# Altium PCB PCB2.PcbDoc (part 2 of 2)
Units mil, origin at the board's own origin, x right, y up, seen from the top; angles counter-clockwise.
Board outline 3889 x 3936 mil, 2 copper layers (Top Layer, Bottom Layer); 71 components, 78 nets, 442 pads, 93 vias.
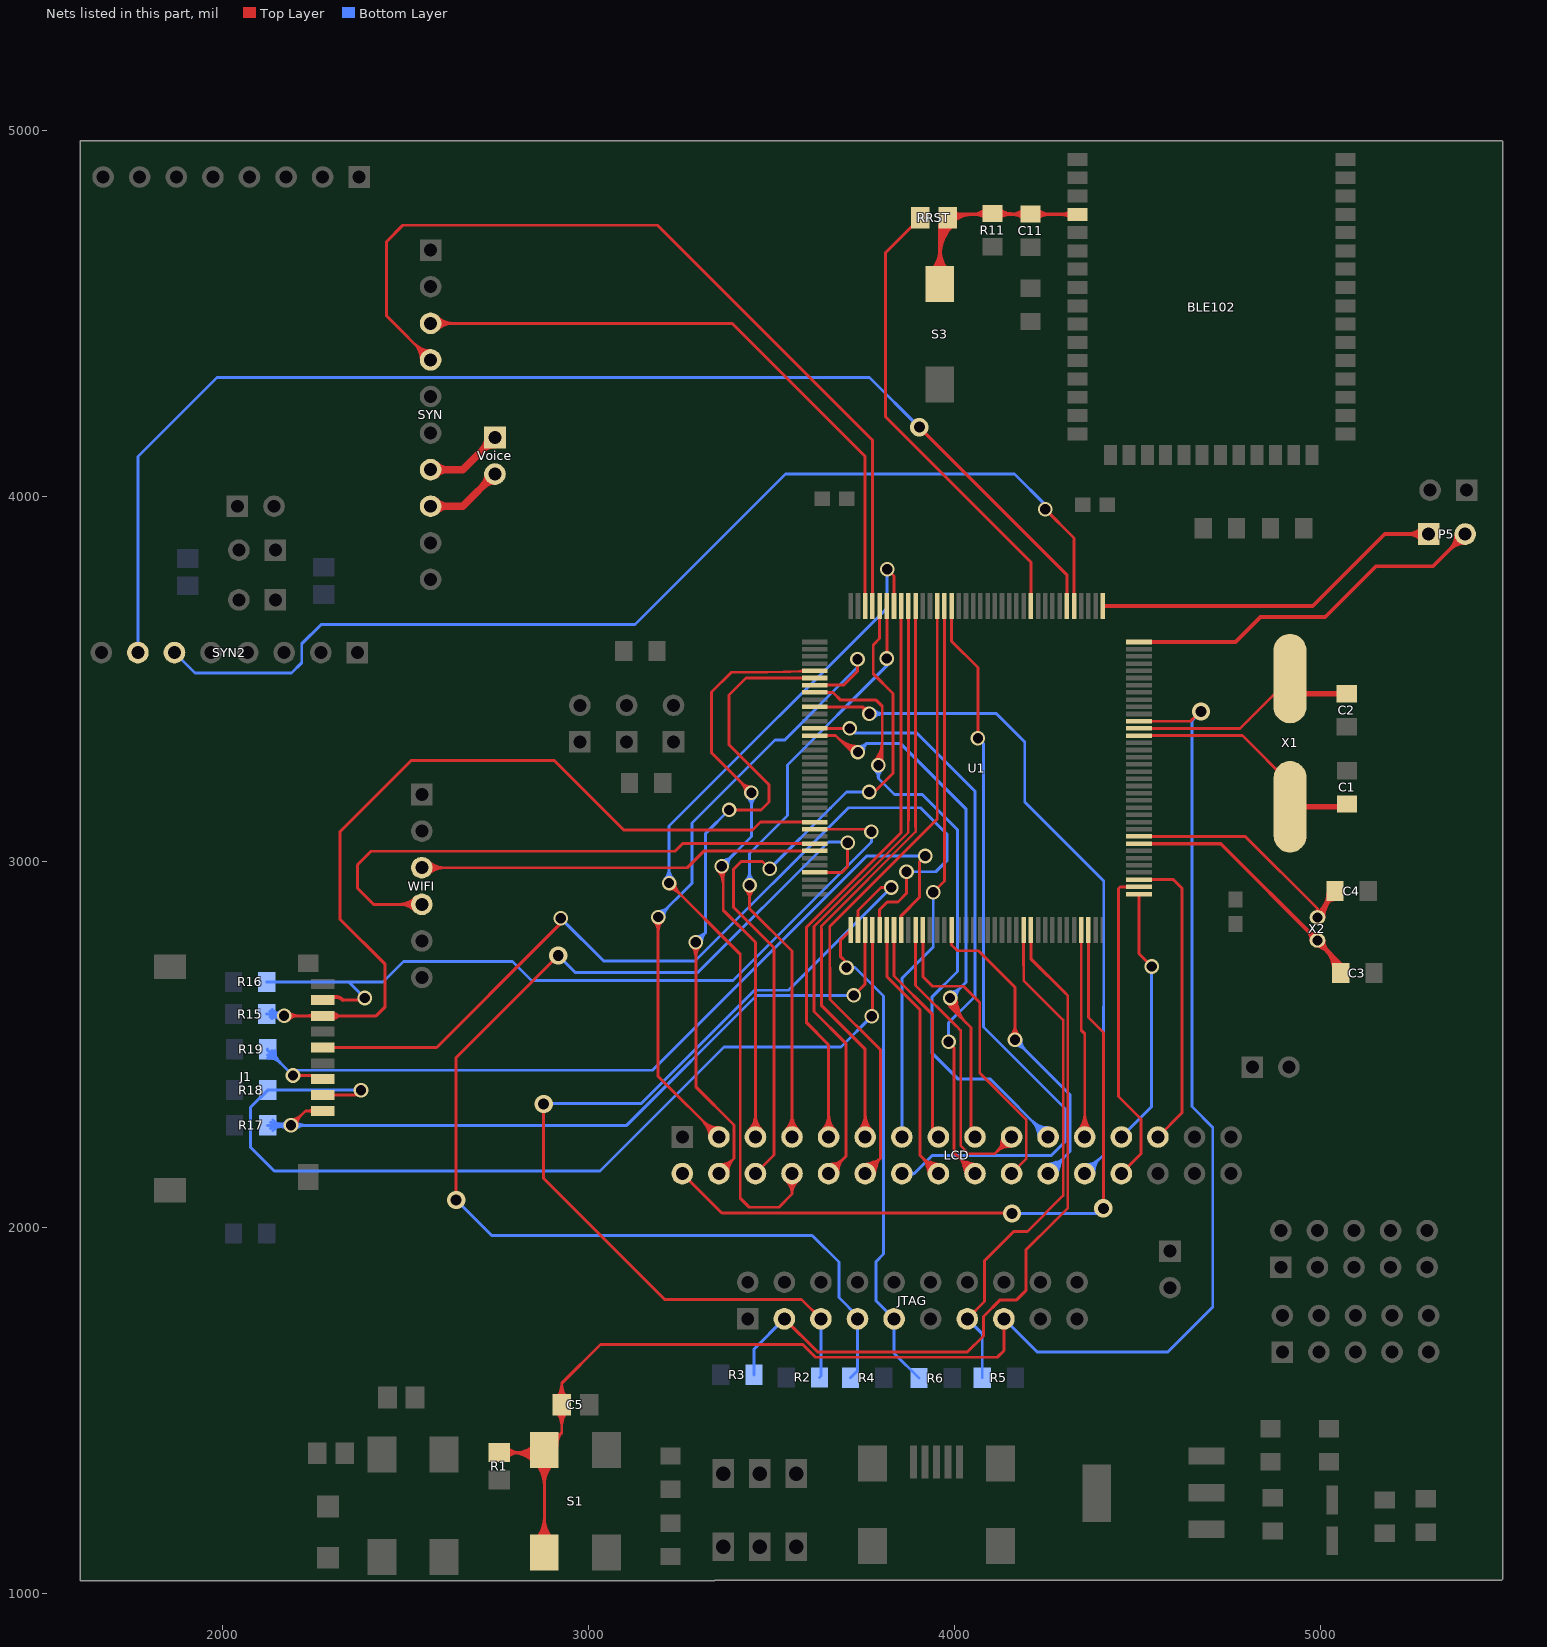
[diagram p2: the nets of this part, all layers, seen from the top]

## Via types
v1: diameter 40, hole 28, Top Layer to Bottom Layer, 56 vias
v2: diameter 50/50 (per signal layer), hole 30, Top Layer to Bottom Layer, 29 vias
v3: diameter 50/50 (per signal layer), hole 139.76, Top Layer to Bottom Layer, 6 vias
v4: diameter 40/40 (per signal layer), hole 30, Top Layer to Bottom Layer, 2 vias

## Nets (pads, with @x,y where several pads share a name; then routed paths per layer and width w, separated by ;. In a path a pad name is that pad's centre, name@x,y a point inside that pad or via, vN(x,y) a via of type N, cw(c..) or ccw(c..) an arc to the next point about the centre after c; other vN are vias at no path point) (continued)
NetRRST_2: RRST.2 U1.47 | length 1264.1
  Top Layer w8: RRST.2@3906.6,4760 3812,4665.4 3812,4216 4208.72,3819.28 U1.47@4208.72,3699.4
NetSYN_7: SYN.7 Voice.1 | length 371.9
  Top Layer w20: SYN.7@2560,4080 SYN.7@2568,4072 2656,4072 Voice.1@2744,4160 ; SYN.7@2581.81,4058.19 cw(c2615.14,4024.86) 2615.14,4072 cw(c2615.14,4119.14) SYN.7@2581.81,4085.81 ; Voice.1@2724.47,4160 cw(c2677.33,4160) 2710.66,4126.66 cw(c2744,4093.33) Voice.1@2744,4140.47
NetSYN_8: SYN.8 Voice.2 | length 371.9
  Top Layer w20: SYN.8@2560,3980 SYN.8@2568,3972 2656,3972 Voice.2@2744,4060 ; SYN.8@2581.81,3958.19 cw(c2615.14,3924.86) 2615.14,3972 cw(c2615.14,4019.14) SYN.8@2581.81,3985.81 ; Voice.2@2724.47,4060 cw(c2677.33,4060) 2710.66,4026.66 cw(c2744,3993.33) Voice.2@2744,4040.47
NRESET: BLE102.4 C11.2 R11.1 RRST.1 S3.1 | length 1919.6
  Top Layer w8: R11.1@4104,4772 4155,4772 ; R11.1@4116.19,4763.82 cw(c4135.81,4744.39) 4135.81,4772 cw(c4135.81,4799.61) R11.1@4116.19,4780.18 ; R11.1@4121.88,4758.19 cw(c4155,4725.38) 4155,4772 ; R11.1@4121.88,4785.81 ccw(c4155,4818.62) 4155,4772 ; C11.2@4190.19,4756.99 ccw(c4156.69,4723.49) 4156.69,4770.87 ccw(c4156.69,4818.24) C11.2@4190.19,4784.74 ; C11.2@4195.85,4762.65 ccw(c4176.01,4742.81) 4176.01,4770.87 ccw(c4176.01,4798.92) C11.2@4195.85,4779.08 ; C11.2@4208,4770.87 4156.13,4770.87 4155,4772
  Top Layer w10: S3.1@3935.7,4614.15 ccw(c3877.02,4672.82) 3960,4672.82 ccw(c4042.98,4672.82) S3.1@3984.3,4614.15 ; S3.1@3942.77,4607.07 ccw(c3901.17,4648.68) 3960,4648.68 ccw(c4018.83,4648.68) S3.1@3977.23,4607.07 ; S3.1@3960,4580 3960,4738.6 RRST.1@3981.4,4760 3991.28,4769.87 BLE102.4@4336,4769.87 ; 3960,4654.68 cw(c4082.78,4654.68) RRST.1@3995.96,4741.5 ; 3960,4678.83 cw(c4058.64,4678.83) RRST.1@3988.89,4748.57 ; 3960,4702.97 cw(c4034.5,4702.97) RRST.1@3981.82,4755.65 ; 3960,4727.11 cw(c4010.35,4727.11) RRST.1@3974.75,4762.72 ; RRST.1@3988.89,4756.45 cw(c4021.3,4724.04) 4021.3,4769.87 ; RRST.1@3995.96,4749.38 cw(c4045.45,4699.89) 4045.45,4769.87 ; RRST.1@3995.96,4778.5 ccw(c4016.78,4799.31) 4016.78,4769.87 ; 4049.97,4769.87 ccw(c4049.97,4822.09) R11.1@4086.9,4785.17 ; 4060.24,4769.87 cw(c4060.24,4732.18) R11.1@4086.9,4758.83 ; 4074.11,4769.87 ccw(c4074.11,4797.95) R11.1@4093.97,4778.1 ; R11.1@4114.03,4778.1 ccw(c4133.89,4797.95) 4133.89,4769.87 ; R11.1@4121.1,4758.83 cw(c4147.76,4732.18) 4147.76,4769.87 ; R11.1@4121.1,4785.17 ccw(c4158.03,4822.09) 4158.03,4769.87 ; 4156.71,4769.87 ccw(c4156.71,4818.22) C11.2@4190.9,4784.03 ; 4161.5,4769.87 cw(c4161.5,4728.3) C11.2@4190.9,4757.7 ; C11.2@4225.1,4757.7 cw(c4254.5,4728.3) 4254.5,4769.87 ; C11.2@4225.1,4784.03 ccw(c4259.29,4818.22) 4259.29,4769.87 ; 4295.46,4769.87 cw(c4295.46,4739.17) 4317.17,4760.88 ccw(c4295.46,4739.17) 4295.46,4769.87 ; 4295.46,4769.87 ccw(c4295.46,4800.57) 4317.17,4778.87 cw(c4295.46,4800.57) 4295.46,4769.87
NRST: C5.1 JTAG.15 R1.1 S1.1 S1.4 U1.25 | length 5901.3
  Top Layer w8: R1.1@2756,1385.4 2872.4,1385.4 S1.4@2879,1392 ; R1.1@2769.55,1375.79 cw(c2792.75,1352.59) 2792.75,1385.4 cw(c2792.75,1418.21) R1.1@2769.55,1395.01 ; R1.1@2775.2,1370.14 cw(c2812.06,1333.28) 2812.06,1385.4 cw(c2812.06,1437.53) R1.1@2775.2,1400.67 ; 2785.78,1385.4 cw(c2785.78,1288.93) 2853.99,1357.15 cw(c2793.61,1296.77) 2879,1296.77 cw(c2964.39,1296.77) S1.4@2904.01,1357.15 ; 2801.44,1385.4 ccw(c2801.44,1459.72) S1.4@2853.99,1407.17 ; 2805.09,1385.4 cw(c2805.09,1308.25) 2859.65,1362.8 cw(c2812.92,1316.08) 2879,1316.08 cw(c2945.08,1316.08) S1.4@2898.35,1362.8 ; 2820.76,1385.4 ccw(c2820.76,1440.4) S1.4@2859.65,1401.51 ; 2824.4,1385.4 cw(c2824.4,1327.56) 2865.3,1368.46 cw(c2832.24,1335.39) 2879,1335.39 cw(c2925.76,1335.39) S1.4@2892.7,1368.46 ; S1.1@2853.99,1146.85 ccw(c2793.61,1207.23) 2879,1207.23 ccw(c2964.39,1207.23) S1.1@2904.01,1146.85 ; S1.1@2859.65,1141.2 ccw(c2812.92,1187.92) 2879,1187.92 ccw(c2945.08,1187.92) S1.1@2898.35,1141.2 ; S1.1@2865.3,1135.54 ccw(c2832.24,1168.61) 2879,1168.61 ccw(c2925.76,1168.61) S1.1@2892.7,1135.54 ; S1.1@2879,1112 S1.4@2879,1392 ; S1.4@2890.61,1426.63 ccw(c2901.07,1448.99) 2918.53,1431.53 ; S1.4@2894,1433.88 ccw(c2906.22,1459.97) 2926.6,1439.6 ; S1.4@2906.25,1404.43 cw(c2935.01,1407.15) S1.4@2914.58,1427.58 ; C5.1@2911.33,1496.8 cw(c2874.47,1459.94) 2926.6,1459.94 cw(c2978.72,1459.94) C5.1@2941.86,1496.8 ; S1.4@2914.21,1405.18 cw(c2956.96,1409.23) 2926.6,1439.6 ; C5.1@2916.99,1502.45 cw(c2893.79,1479.25) 2926.6,1479.25 cw(c2959.41,1479.25) 2936.21,1502.45 2936.21,1530 2936.21,1529.55 cw(c2959.41,1552.75) 2926.6,1552.75 cw(c2893.79,1552.75) 2916.99,1529.55 2916.99,1530 2914,1530 2914,1535.2 2911.33,1535.2 ccw(c2874.47,1572.06) 2926.6,1572.06 ; C5.1@2926.6,1516 2926.6,1439.6 ; C5.1@2941.86,1535.2 cw(c2978.72,1572.06) 2926.6,1572.06 ; JTAG.15@4135,1751 4135,1664 4117,1646 3620.2,1646 3585.2,1681 3032.6,1681 2926.6,1575 2926.6,1572.06 ; U1.25@4504,3384.44 4645.44,3384.44 v2@4681,3420 ; S1.4@2879,1392 2926.6,1439.6
  Bottom Layer w8: JTAG.15@4135,1751 4226,1660 4583,1660 4706,1783 4706,2274 4649,2331 4649,3386 v2(4674,3411)
NTRST: JTAG.3 R3.1 U1.134 | length 2060.9
  Top Layer w7: 4274.53,2018.73 4310,2054.2 4310,2634 4304.5,2639.5
  Top Layer w8: JTAG.3@3535,1751 3626,1660 4035,1660 4079,1704 4079,1757 4125,1803 4170,1803 4195,1828 4195,1939.2 4274.53,2018.73 ; U1.134@4208.72,2813.57 4208.72,2735.28 4304.5,2639.5
  Bottom Layer w8: R3.1@3452,1598 3452,1668 JTAG.3@3535,1751
OSC32_IN: C3.1 U1.8 X2.2 | length 1109.6
  Top Layer w8: X2.2@4994.13,2770.46 4994.13,2770 5019,2756 5020.1,2752.44
  Top Layer w10: U1.8@4504,3049.8 4727.51,3049.8 X2.2@4992.17,2785.14 5056,2721.31 C3.1@5056,2696 ; 4963.74,2813.57 cw(c4935.31,2785.14) X2.2@4975.51,2785.14 ; 4968.49,2808.82 ccw(c4990.2,2830.53) X2.2@4990.2,2799.83 ; X2.2@4991.56,2770.69 cw(c4983.81,2727.11) 5020.1,2752.44 ; X2.2@4994.13,2770.46 cw(c4994.13,2739.76) 5015.84,2761.47 ; X2.2@4998.62,2771.16 cw(c5001.6,2761.83) 5009.64,2767.44 cw(c5021.1,2775.43) X2.2@5007.95,2780.17 ; X2.2@5008.59,2782.57 ccw(c5034.83,2777.91) 5012.98,2762.65 ; X2.2@5008.82,2785.14 ccw(c5049.02,2785.14) 5020.6,2756.71 ; 5009.1,2768.21 cw(c4940.82,2699.94) C3.1@5037.38,2699.94 ; 5026.17,2751.14 cw(c4974.96,2699.94) C3.1@5047.38,2699.94 ; 5043.24,2734.07 cw(c5009.11,2699.94) C3.1@5057.38,2699.94
OSC32_OUT: C4.1 U1.9 X2.1 | length 957.1
  Top Layer w8: U1.9@4504,3069.48 4794.85,3069.48 4992.17,2872.17 ; X2.1@4992.17,2848.14 X2.1@4992.17,2860 ; X2.1@4993.82,2848.14 cw(c5026.45,2848.14) 5003.38,2871.21 ; 5000.68,2868.52 ccw(c4953.14,2916.06) C4.1@5020.38,2916.06 ; X2.1@5001.82,2848.14 cw(c5053.77,2848.14) 5017.03,2884.87 ; X2.1@5009.82,2848.14 cw(c5081.08,2848.14) C4.1@5030.69,2898.53 ; 5014.34,2882.18 ccw(c4980.45,2916.06) C4.1@5028.38,2916.06 ; 5020.55,2888.38 cw(c5040,2868.94) C4.1@5040,2896.44 ; C4.1@5040,2920 5040,2907.83 X2.1@4992.17,2860 ; X2.1@4992.17,2860 4992.17,2872.17 ; 4992.17,2872.17 cw(c4981.6,2872.17) 4985.85,2862.49 ccw(c4981.6,2872.17) 4992.17,2872.17 ; 4992.17,2872.17 ccw(c5002.73,2872.17) 4998.48,2862.49 cw(c5002.73,2872.17) 4992.17,2872.17
OSC_IN: C1.2 U1.23 X1.2 | length 690.2
  Top Layer w8: U1.23@4504,3345.07 4786.93,3345.07 4917.34,3214.66 X1.2@4917.34,3150.61
  Top Layer w15: X1.2@4917.34,3150.61 5065.47,3150.61 C1.2@5073,3158.13
OSC_OUT: C2.2 U1.24 X1.1 | length 647.5
  Top Layer w8: U1.24@4504,3364.75 4780.75,3364.75 X1.1@4917,3501
  Top Layer w15: X1.1@4917,3501 4958.13,3459.87 C2.2@5078,3459.87
PC8: J1.7 R15.1 U1.98 | length 2919.3
  Top Layer w8: v1(2167.74,2579.26) J1.7@2273.39,2579.26 2284,2579.26 2314.71,2579.26 ; v1@2179.05,2567.95 cw(c2206.37,2540.63) 2206.37,2579.26 cw(c2206.37,2617.89) v1@2179.05,2590.57 ; J1.7@2248.75,2572.34 ccw(c2232.06,2555.65) 2232.06,2579.26 ccw(c2232.06,2602.87) J1.7@2248.75,2586.18 ; J1.7@2298.02,2572.34 cw(c2314.71,2555.65) 2314.71,2579.26 ; J1.7@2298.02,2586.18 ccw(c2314.71,2602.87) 2314.71,2579.26 ; U1.98@3618.17,3108.85 3470,3108.85 3448.15,3087 3096,3087 2906,3277 2515,3277 2320,3082 2320,2844 2444,2720 2444,2604 2419.26,2579.26 2314.71,2579.26
  Top Layer w10: J1.7@2273.39,2579.26 ccw(c2294.05,2599.92) 2314.71,2579.26 ccw(c2299.36,2563.9) J1.7@2284,2579.26
  Bottom Layer w8: v1(2167.74,2579.26) v1@2163,2584 ; R15.1@2120,2584 cw(c2120,2534.69) 2156.04,2568.34 ccw(c2120,2534.69) R15.1@2120,2584 ; R15.1@2120,2584 v1@2163,2584 ; 2145.47,2584 cw(c2145.47,2606.09) 2128.78,2591.62 ccw(c2145.47,2606.09) 2145.47,2584 ; 2145.47,2584 ccw(c2145.47,2561.91) 2128.78,2576.38 cw(c2145.47,2561.91) 2145.47,2584 ; v1@2163,2584 cw(c2163,2621.3) 2134.82,2596.86 ccw(c2163,2621.3) v1@2163,2584 ; v1@2163,2584 ccw(c2163,2546.7) 2134.82,2571.14 cw(c2163,2546.7) v1@2163,2584 ; R15.1@2138.42,2584 cw(c2138.42,2551.88) 2161.89,2573.8 ccw(c2138.42,2551.88) R15.1@2138.42,2584 ; R15.1@2140.56,2584 ccw(c2140.56,2606.44) 2156.43,2590.57 cw(c2140.56,2606.44) R15.1@2140.56,2584
PC9: J1.8 R16.1 U1.99 | length 2304.5
  Top Layer w8: J1.8@2273.39,2622.57 J1.8@2288,2622.57 ; 2328,2622.57 2382.57,2622.57 v1(2388,2628) ; U1.99@3618.17,3089.17 3718.83,3089.17 ; 3678,3089.17 3718.83,3089.17 ; v1(3773,3082) 3765.83,3089.17 3718.83,3089.17
  Top Layer w10: J1.8@2288,2622.57 cw(c2308,2602.57) 2328,2622.57
  Bottom Layer w8: R16.1@2120,2672 2344,2672 ; v1(2388,2628) 2356,2660 2352,2664 2344,2672 ; 3340,2676 3380,2676 ; v1(3773,3082) 3773,3054 3395,2676 3380,2676 ; 2344,2672 2438,2672 2494,2728 2792,2728 2844,2676 3380,2676
PC10: J1.1 R17.2 U1.111 | length 2505.2
  Top Layer w8: v1(2186.58,2280) 2226,2319.42 J1.1@2273.39,2319.42 ; v1@2186.58,2296 ccw(c2186.58,2334.63) 2213.9,2307.31 ccw(c2241.21,2280) v1@2202.58,2280 ; J1.1@2248.75,2312.5 ccw(c2232.06,2295.81) 2232.06,2319.42 ccw(c2232.06,2343.03) J1.1@2248.75,2326.33 ; v1(3725,2635) 3755.97,2665.97 3755.97,2739.97 ; 3755.97,2748 3755.97,2739.97 ; U1.111@3755.97,2813.58 3755.97,2739.97
  Bottom Layer w8: R17.2@2122.87,2280 v1(2186.58,2280) 3104,2280 3459,2635 v1(3725,2635) ; R17.2@2131.08,2271.78 cw(c2150.92,2251.94) 2150.92,2280 cw(c2150.92,2308.06) R17.2@2131.08,2288.22 ; R17.2@2136.74,2266.13 cw(c2170.24,2232.63) 2170.24,2280 cw(c2170.24,2327.37) R17.2@2136.74,2293.87 ; 2153.63,2275.55 cw(c2159.07,2255.27) v1@2174.68,2269.3 ; 2153.63,2284.45 ccw(c2159.07,2304.73) v1@2174.68,2290.7 ; 2158.04,2276.73 ccw(c2151.78,2300.09) v1@2172.73,2288 ; 2158.04,2283.27 cw(c2151.78,2259.91) v1@2172.73,2272 ; 2166.23,2278.93 cw(c2169.95,2265.05) v1@2180.63,2274.65 ; 2166.23,2281.07 ccw(c2169.95,2294.95) v1@2180.63,2285.35 ; v1@2175.27,2268.69 ccw(c2147.95,2241.37) 2147.95,2280 ccw(c2147.95,2318.63) v1@2175.27,2291.31 ; v1@2197.9,2268.69 cw(c2225.21,2241.37) 2225.21,2280 cw(c2225.21,2318.63) v1@2197.9,2291.31
PC11: J1.2 R18.2 U1.112 | length 2710.7
  Top Layer w8: J1.2@2273.39,2362.72 2364.72,2362.72 v1(2378,2376) ; v1(3774,2578) 3775.65,2579.65 3775.65,2664.35 ; 3775.65,2698 3775.65,2664.35 ; U1.112@3775.65,2813.57 3775.65,2664.35
  Bottom Layer w8: v1(2378,2376) R18.2@2122.87,2376 2076,2329.13 2076,2220 2141,2155 3031,2155 3370,2494 3690,2494 v1(3774,2578)
PC12: J1.5 U1.113 | length 2585.3
  Top Layer w8: J1.5@2273.39,2492.65 2584.65,2492.65 2872,2780 ; 2822,2730 2872,2780 ; v1(2924,2846) 2924,2832 2872,2780 ; U1.113@3795.34,2813.57 3795.34,2869.34 3816.5,2890.5 3845.5,2890.5 3869,2914 v1(3869,2973)
  Bottom Layer w8: v1(2924,2846) 3041.25,2728.75 3291,2728.75 3710.25,3148 3907,3148 3979,3076 3979,3003 3949,2973 v1(3869,2973)
PD0: LCD.16 U1.114 | length 1642.4
  Top Layer w8: U1.114@3815.02,2813.57 3815.02,2686.58 3906,2595.6 3906,2198 LCD.16@3956,2148 ; 3921.21,2182.55 ccw(c3965.51,2194.42) LCD.16@3956.31,2149.5 ; 3921.45,2182.79 cw(c3909.58,2138.49) LCD.16@3954.5,2147.69 ; 3924.57,2170.04 ccw(c3962.6,2180.24) LCD.16@3954.7,2141.66 ; 3927.27,2176 ccw(c3946.54,2186.15) LCD.16@3951.78,2165.01 ; 3927.92,2157.54 ccw(c3959.7,2166.05) LCD.16@3953.1,2133.82 ; 3928,2176.73 cw(c3917.85,2157.46) LCD.16@3938.99,2152.22 ; 3930.25,2170.34 cw(c3913.1,2161.3) LCD.16@3931.62,2155.56 ; LCD.16@3931.59,2155.47 ccw(c3910.02,2162.08) 3926.08,2177.92 ; LCD.16@3931.64,2155.62 ccw(c3910.58,2162.21) 3926.08,2177.92 ; LCD.16@3931.68,2155.76 ccw(c3911.07,2162.33) 3926.47,2177.53 ; LCD.16@3931.73,2155.91 ccw(c3911.61,2162.47) 3926.47,2177.53 ; 3932.03,2166.97 ccw(c3949.07,2175.94) LCD.16@3953.71,2157.25 ; 3933.66,2173.75 ccw(c3942.7,2190.9) LCD.16@3948.44,2172.38 ; 3933.96,2179.43 cw(c3923.76,2141.4) LCD.16@3962.34,2149.3 ; 3937.03,2171.97 cw(c3928.06,2154.93) LCD.16@3946.75,2150.29 ; 3946.46,2176.08 cw(c3937.95,2144.3) LCD.16@3970.18,2150.9 ; LCD.16@3948.09,2172.27 cw(c3941.53,2192.39) 3926.47,2177.53 ; LCD.16@3948.24,2172.32 cw(c3941.67,2192.93) 3926.47,2177.53 ; LCD.16@3948.38,2172.36 cw(c3941.79,2193.42) 3926.08,2177.92 ; LCD.16@3948.53,2172.41 cw(c3941.92,2193.98) 3926.08,2177.92 ; 3912.42,2191.58 cw(c3868.84,2148) 3930.47,2148 ccw(c3868.84,2148) 3912.42,2191.58 ; 3912.42,2191.58 ccw(c3956,2235.16) 3956,2173.53 cw(c3956,2235.16) 3912.42,2191.58 ; 3926.08,2177.92 cw(c3896.16,2148) 3938.47,2148 ccw(c3896.16,2148) 3926.08,2177.92 ; 3926.08,2177.92 ccw(c3956,2207.84) 3956,2165.53 cw(c3956,2207.84) 3926.08,2177.92
PD1: LCD.15 U1.115 | length 615.8
  Top Layer w8: U1.115@3834.71,2813.58 3834.71,2688.12 3939.42,2583.42 3939.42,2264.58 LCD.15@3956,2248
PD4: LCD.19 U1.118 | length 1154.7
  Top Layer w7: 4005,2551 4017,2539 4017,2264.22 ; 4016.97,2264.19 4016.97,2225.03 4040,2202 4110,2202 4127,2219
  Top Layer w8: U1.118@3893.77,2813.57 3893.77,2662.23 4005,2551 ; 4127,2219 LCD.19@4156,2248 ; 4128.24,2233.2 cw(c4165.92,2226.33) LCD.19@4149.97,2261.16 ; 4141.2,2220.24 ccw(c4134.33,2257.92) LCD.19@4169.16,2241.97 ; 4117,2209 ccw(c4083.9,2242.1) 4130.56,2245.92 cw(c4083.9,2242.1) 4117,2209 ; 4117,2209 cw(c4150.1,2175.9) 4153.92,2222.56 ccw(c4150.1,2175.9) 4117,2209 ; 4129.22,2221.22 ccw(c4106.5,2243.95) 4138.53,2246.57 cw(c4106.5,2243.95) 4129.22,2221.22 ; 4129.22,2221.22 cw(c4151.95,2198.5) 4154.57,2230.53 ccw(c4151.95,2198.5) 4129.22,2221.22
PD5: LCD.20 U1.119 | length 849
  Top Layer w7: LCD.20@4156,2148 4196,2188 4196,2296 4163,2329
  Top Layer w8: U1.119@3913.45,2813.57 3913.45,2686.55 3940,2660 4025,2660 4069,2616 4069,2423 4163,2329
PD7: LCD.22 U1.123 | length 1664.9
  Top Layer w8: U1.123@3992.19,2813.57 3992.19,2772.81 4008,2757 4066,2757 4165.5,2657.5 v1(4165.5,2514) ; v1@4154.19,2525.31 ccw(c4126.87,2552.63) 4165.5,2552.63 ccw(c4204.13,2552.63) v1@4176.81,2525.31
  Bottom Layer w8: v1@4165.5,2498 cw(c4165.5,2459.37) 4192.81,2486.69 cw(c4220.13,2514) v1@4181.5,2514 ; v1(4165.5,2514) 4316,2363.5 4316,2208 LCD.22@4256,2148 ; LCD.22@4241.82,2150.9 cw(c4274.05,2144.3) 4265.54,2176.08 ; LCD.22@4249.66,2149.3 cw(c4288.24,2141.4) 4278.04,2179.43 ; LCD.22@4255.69,2149.5 ccw(c4246.49,2194.42) 4290.79,2182.55 ; LCD.22@4257.3,2141.66 ccw(c4249.4,2180.24) 4287.43,2170.04 ; LCD.22@4257.5,2147.69 cw(c4302.42,2138.49) 4290.55,2182.79 ; LCD.22@4258.9,2133.82 ccw(c4252.3,2166.05) 4284.08,2157.54 ; LCD.22@4263.47,2172.41 ccw(c4270.08,2193.98) 4285.92,2177.92 ; LCD.22@4263.62,2172.36 ccw(c4270.21,2193.42) 4285.92,2177.92 ; LCD.22@4280.36,2155.62 cw(c4301.42,2162.21) 4285.92,2177.92 ; LCD.22@4280.41,2155.47 cw(c4301.98,2162.08) 4285.92,2177.92 ; 4285.92,2177.92 cw(c4256,2207.84) 4256,2165.53 ccw(c4256,2207.84) 4285.92,2177.92 ; 4285.92,2177.92 ccw(c4315.84,2148) 4273.53,2148 cw(c4315.84,2148) 4285.92,2177.92 ; 4299.58,2191.58 cw(c4256,2235.16) 4256,2173.53 ccw(c4256,2235.16) 4299.58,2191.58 ; 4299.58,2191.58 ccw(c4343.16,2148) 4281.53,2148 cw(c4343.16,2148) 4299.58,2191.58
PD8: LCD.5 U1.77 | length 2090.7
  Top Layer w8: v1@3352.69,2976.69 cw(c3315.72,2939.72) 3368,2939.72 ; v1@3358.34,2982.34 cw(c3335.03,2959.03) 3368,2959.03 cw(c3392.97,2959.03) v1@3375.31,2976.69 ; v1(3364,2988) 3368,2984 3368,2868 3456,2780 LCD.5@3456,2248 ; v1@3429,3189 ccw(c3390.37,3189) 3417.69,3216.31 ccw(c3445,3243.63) v1@3445,3205 ; LCD.5@3437.95,2266.05 ccw(c3394.37,2309.63) 3456,2309.63 ccw(c3517.63,2309.63) LCD.5@3474.05,2266.05 ; LCD.5@3443.61,2260.39 ccw(c3413.68,2290.32) 3456,2290.32 ccw(c3498.32,2290.32) LCD.5@3468.39,2260.39 ; v1(3445,3189) 3336,3298 3336,3464 3390.3,3518.3 3488,3518.3 U1.77@3618.17,3522.24 ; 3581.46,3521.13 ccw(c3581.2,3529.57) 3587.35,3523.78 cw(c3581.2,3529.57) 3581.46,3521.13
  Bottom Layer w8: v1@3356,2988 v1(3364,2988) 3445,3069 v1(3445,3189) ; v1@3364,3004 ccw(c3364,3042.63) 3391.31,3015.31 ccw(c3418.63,2988) v1@3380,2988 ; v1@3433.69,3177.69 cw(c3406.37,3150.37) 3445,3150.37 cw(c3483.63,3150.37) v1@3456.31,3177.69
PD9: LCD.4 U1.78 | length 2055.3
  Top Layer w8: v1@3281.69,2768.69 cw(c3254.37,2741.37) 3293,2741.37 cw(c3331.63,2741.37) v1@3304.31,2768.69 ; v1(3293,2780) 3293,2385.58 3397.53,2281.06 3397.53,2189.53 LCD.4@3356,2148 ; LCD.4@3357.59,2165.46 ccw(c3360.42,2196.48) 3382.45,2174.45 ccw(c3404.48,2152.42) LCD.4@3373.46,2149.59 ; LCD.4@3358.32,2173.42 ccw(c3362.44,2218.61) 3394.53,2186.53 ccw(c3426.61,2154.44) LCD.4@3381.42,2150.32 ; v1(3384,3142) 3471,3142 3493,3164 3493,3211 3384,3320 3384,3456 3430.55,3502.55 U1.78@3618.17,3502.55
  Bottom Layer w8: v1(3293,2780) 3320,2807 ; v1@3293.13,2796 ccw(c3293.44,2833.56) 3320,2807 ; v1@3309,2780.13 cw(c3346.56,2780.44) 3320,2807 ; v1(3384,3142) 3320,3078 3320,2807
PD10: LCD.3 U1.79 | length 2066.3
  Top Layer w8: v1@3178.69,2837.69 cw(c3151.37,2810.37) 3190,2810.37 cw(c3228.63,2810.37) v1@3201.31,2837.69 ; v1(3190,2849) 3190,2414 LCD.3@3356,2248 ; LCD.3@3330.47,2248 ccw(c3268.84,2248) 3312.42,2291.58 ccw(c3356,2335.16) LCD.3@3356,2273.53 ; LCD.3@3338.47,2248 ccw(c3296.16,2248) 3326.08,2277.92 ccw(c3356,2307.84) LCD.3@3356,2265.53 ; U1.79@3618.17,3482.87 3696.87,3482.87 3735,3521 v1(3735,3554)
  Bottom Layer w8: v1(3190,2849) 3282.5,2941.5 3282.5,3106.5 3509.41,3333.41 3536,3333.41 3735,3532.41 v1(3735,3554) ; v1@3190,2865 ccw(c3190,2903.63) 3217.31,2876.31 ccw(c3244.63,2849) v1@3206,2849
PD11: LCD.21 U1.80 | length 2075.7
  Top Layer w8: U1.80@3618.17,3463.18 3667.9,3463.18 3689.07,3442.01 3785.99,3442.01 3802.5,3425.5 3802.5,3274.5 v1(3792,3264) ccw(c3766.65,3289.35) 3802.5,3289.35 ; v1@3780.69,3275.31 ccw(c3728.02,3327.98) 3802.5,3327.98 ; v1@3786.34,3269.66 ccw(c3747.34,3308.66) 3802.5,3308.66
  Bottom Layer w8: v1@3781.28,3252.12 cw(c3759.5,3228) 3792,3228 ; v1(3792,3264) 3792,3228 ; v1@3802.72,3252.12 ccw(c3824.5,3228) 3792,3228 ; LCD.21@4230.47,2248 ccw(c4168.84,2248) 4212.42,2291.58 ccw(c4256,2335.16) LCD.21@4256,2273.53 ; LCD.21@4238.47,2248 ccw(c4196.16,2248) 4226.08,2277.92 ccw(c4256,2307.84) LCD.21@4256,2265.53 ; LCD.21@4256,2248 4097,2407 4009,2407 3938,2478 3938,2630 4008,2700 4008,3088 3912,3184 3836,3184 3792,3228
PD13: LCD.24 U1.82 | length 2163.2
  Top Layer w8: U1.82@3618.17,3423.81 3748.69,3423.81 ; v1(3767.5,3405) 3748.69,3423.81 ; 3748.69,3423.81 cw(c3738.71,3413.83) 3752.2,3409.69 ccw(c3738.71,3413.83) 3748.69,3423.81 ; 3748.69,3423.81 ccw(c3758.67,3433.79) 3762.81,3420.3 cw(c3758.67,3433.79) 3748.69,3423.81
  Bottom Layer w8: v1(3767.5,3405) 4115,3405 4192,3328 4192,3164 4408,2948 4408,2605 4407,2604 4407,2199 LCD.24@4356,2148 ; v1@3778.81,3393.69 cw(c3806.13,3366.37) 3806.13,3405 cw(c3806.13,3443.63) v1@3778.81,3416.31 ; LCD.24@4357.43,2165.47 ccw(c4360.05,2197.5) 4382.78,2174.78 ccw(c4405.5,2152.05) LCD.24@4373.47,2149.43 ; LCD.24@4358.08,2173.44 ccw(c4361.9,2220.1) 4395,2187 ccw(c4428.1,2153.9) LCD.24@4381.44,2150.08
PD14: LCD.18 U1.85 | length 2361.8
  Top Layer w8: U1.85@3618.17,3364.75 v1(3714,3364.75) ; v1(3984,2508) 3999,2493 3999,2205 LCD.18@4056,2148 ; 4021.21,2182.55 ccw(c4065.51,2194.42) LCD.18@4056.31,2149.5 ; 4021.45,2182.79 cw(c4009.58,2138.49) LCD.18@4054.5,2147.69 ; 4024.57,2170.04 ccw(c4062.6,2180.24) LCD.18@4054.7,2141.66 ; 4027.27,2176 ccw(c4046.54,2186.15) LCD.18@4051.78,2165.01 ; 4028,2176.73 cw(c4017.85,2157.46) LCD.18@4038.99,2152.22 ; 4030,2174 4046,2174 4046,2176.08 4046.46,2176.08 cw(c4037.95,2144.3) LCD.18@4070.18,2150.9 ; 4030.25,2170.34 cw(c4013.1,2161.3) LCD.18@4031.62,2155.56 ; LCD.18@4031.64,2155.62 ccw(c4010.58,2162.21) 4026.08,2177.92 ; LCD.18@4031.68,2155.76 ccw(c4011.07,2162.33) 4026.47,2177.53 ; LCD.18@4031.73,2155.91 ccw(c4011.61,2162.47) 4026.47,2177.53 ; 4032.03,2166.97 ccw(c4049.07,2175.94) LCD.18@4053.71,2157.25 ; 4033.66,2173.75 ccw(c4042.7,2190.9) LCD.18@4048.44,2172.38 ; 4033.96,2179.43 cw(c4023.76,2141.4) LCD.18@4062.34,2149.3 ; 4037.03,2171.97 cw(c4028.06,2154.93) LCD.18@4046.75,2150.29 ; LCD.18@4048.09,2172.27 cw(c4041.53,2192.39) 4026.47,2177.53 ; LCD.18@4048.24,2172.32 cw(c4041.67,2192.93) 4026.47,2177.53 ; LCD.18@4048.38,2172.36 cw(c4041.79,2193.42) 4026.08,2177.92 ; LCD.18@4048.53,2172.41 cw(c4041.92,2193.98) 4026.08,2177.92 ; LCD.18@4053.1,2133.82 cw(c4059.7,2166.05) 4027.92,2157.54 4030,2157.54 4030,2157.06 4031.59,2155.47 ccw(c4010.02,2162.08) 4026.08,2177.92 ; 4026.08,2177.92 cw(c3996.16,2148) 4038.47,2148 ccw(c3996.16,2148) 4026.08,2177.92 ; 4026.08,2177.92 ccw(c4056,2207.84) 4056,2165.53 cw(c4056,2207.84) 4026.08,2177.92
  Bottom Layer w8: v1(3714,3364.75) 3726.75,3352 3897,3352 4056,3193 4056,2632 3984,2560 v1(3984,2508)
PD15: LCD.17 U1.86 | length 2329.7
  Top Layer w8: U1.86@3618.17,3345.07 3674.93,3345.07 3720,3300 v1(3736,3300) cw(c3736,3338.63) 3708.69,3311.31 ; 3681.37,3338.63 ccw(c3736,3393.25) v1@3736,3316 ; 3695.03,3324.97 ccw(c3736,3365.94) v1@3736,3308 ; v1@3982.83,2612.86 cw(c3976.34,2593.83) 3995.76,2599.03 cw(c4015.19,2604.24) v1@4000.05,2617.47 ; v1@3984.16,2620.98 cw(c3963.64,2583.43) 4004.98,2594.5 ; v1@3992.22,2634.8 cw(c3974.37,2606.01) 4007.34,2613.75 ; 4000.63,2610.71 cw(c4012.46,2613.88) v1@4001.86,2620 ; 4011.75,2594.94 ccw(c3959.98,2582.8) v1(3988,2628) ; LCD.17@4056,2248 4045,2259 4045,2547 3988,2604 ; 3988,2604 cw(c3998,2604) 3994.15,2613.23 ccw(c3998,2604) 3988,2604 ; 3988,2604 ccw(c3978,2604) 3981.85,2613.23 cw(c3978,2604) 3988,2604 ; 3988,2604 v1(3988,2628) ; v1(3988,2628) ccw(c4045.94,2628) 4004.97,2587.03 cw(c4045.94,2628) v1(3988,2628) ; v1@3980,2628 ccw(c4018.63,2628) 3991.31,2600.69 cw(c4018.63,2628) v1@3980,2628 ; v1@3996,2628 ccw(c4073.25,2628) 4018.63,2573.37 cw(c4073.25,2628) v1@3996,2628 ; v1@4004,2628 ccw(c4100.57,2628) 4032.28,2559.72 cw(c4100.57,2628) v1@4004,2628
  Bottom Layer w8: v1(3736,3300) 3760,3324 ; v1@3737.53,3315.93 ccw(c3740.2,3343.8) 3760,3324 ; v1@3751.93,3301.53 cw(c3779.8,3304.2) 3760,3324 ; v1(3988,2628) 4032,2672 4032,3144 3852,3324 3760,3324 ; v1@3988,2644 ccw(c3988,2682.63) 4015.31,2655.31 ccw(c4042.63,2628) v1@4004,2628
PE0: LCD.23 U1.141 | length 896.1
  Top Layer w8: U1.141@4346.52,2813.58 4346.52,2539.48 4356,2530 LCD.23@4356,2248 ; 4356,2290.32 cw(c4313.68,2290.32) 4343.61,2260.39 ccw(c4313.68,2290.32) 4356,2290.32 ; 4356,2290.32 ccw(c4398.32,2290.32) 4368.39,2260.39 cw(c4398.32,2290.32) 4356,2290.32 ; 4356,2309.63 cw(c4294.37,2309.63) 4337.95,2266.05 ccw(c4294.37,2309.63) 4356,2309.63 ; 4356,2309.63 ccw(c4417.63,2309.63) 4374.05,2266.05 cw(c4417.63,2309.63) 4356,2309.63
PE1: LCD.2 U1.142 | length 1991
  Top Layer w8: LCD.2@3256,2148 3364,2040 v2@4169,2040 ; U1.142@4366.2,2813.57 4366.2,2574.8 4407,2534 v2(4407,2053)
  Bottom Layer w8: v2(4157,2039) 4393,2039 v2(4407,2053)
PE2: LCD.25 U1.1 | length 715.8
  Top Layer w8: U1.1@4506.1,2911.18 4506.1,2912 U1.1@4504,2912 4504,2749 v1(4539,2714)
  Bottom Layer w8: LCD.25@4456,2248 4539,2331 v1(4539,2714)
PE3: LCD.26 U1.2 | length 885
  Top Layer w8: LCD.26@4456,2148 4510,2202 4510,2297 4448,2359 4448,2927 4452.69,2931.69 U1.2@4504,2931.69
PE4: LCD.27 U1.3 | length 835
  Top Layer w8: U1.3@4504,2951.37 4598.63,2951.37 4622,2928 4622,2314 LCD.27@4556,2248
PE7: LCD.14 U1.58 | length 2125.7
  Top Layer w8: U1.58@3992.19,3699.4 3992.19,3602.81 4064,3531 v1(4064,3338)
  Bottom Layer w8: LCD.14@3856,2148 3890,2148 ; v1(4064,3338) 4079,3323 4079,2549 4302,2326 4302,2235 4265,2198 3940,2198 3890,2148 ; 3890,2148 cw(c3890,2157.88) 3880.51,2155.12 ccw(c3890,2157.88) 3890,2148 ; 3890,2148 ccw(c3890,2138.12) 3880.51,2140.88 cw(c3890,2138.12) 3890,2148
PE8: LCD.13 U1.59 | length 1668.7
  Top Layer w8: v1(3942,2917) 3972.5,2947.5 U1.59@3972.5,3699.4
  Bottom Layer w8: LCD.13@3856,2248 3856,2646 ; 3856,2477 3856,2646 ; v1(3942,2917) 3942,2767 3856,2681 3856,2646
PE9: LCD.12 U1.60 | length 2663.2
  Top Layer w8: LCD.12@3741.82,2150.9 cw(c3774.05,2144.3) 3765.54,2176.08 ; LCD.12@3749.66,2149.3 cw(c3788.24,2141.4) 3778.04,2179.43 ; LCD.12@3753.95,2171.95 ccw(c3753.95,2233.58) 3797.53,2190 ; LCD.12@3755.69,2149.5 ccw(c3746.49,2194.42) 3790.79,2182.55 ; LCD.12@3756,2148 3797.53,2189.53 ; LCD.12@3756,2173.53 ccw(c3756,2235.16) 3797.48,2189.58 ; LCD.12@3757.3,2141.66 ccw(c3749.4,2180.24) 3787.43,2170.04 ; LCD.12@3757.5,2147.69 cw(c3802.42,2138.49) 3790.55,2182.79 ; LCD.12@3758.29,2157.25 ccw(c3762.93,2175.94) 3779.97,2166.97 ; LCD.12@3758.9,2133.82 ccw(c3752.3,2166.05) 3784.08,2157.54 ; LCD.12@3760.22,2165.01 ccw(c3765.46,2186.15) 3784.73,2176 ; LCD.12@3763.47,2172.41 ccw(c3770.08,2193.98) 3785.92,2177.92 ; LCD.12@3763.56,2172.38 ccw(c3769.3,2190.9) 3778.34,2173.75 ; LCD.12@3763.62,2172.36 ccw(c3770.21,2193.42) 3785.92,2177.92 ; LCD.12@3763.76,2172.32 ccw(c3770.33,2192.93) 3785.53,2177.53 ; LCD.12@3763.91,2172.27 ccw(c3770.47,2192.39) 3785.53,2177.53 ; LCD.12@3765.25,2150.29 cw(c3783.94,2154.93) 3774.97,2171.97 ; LCD.12@3773.01,2152.22 cw(c3794.15,2157.46) 3784,2176.73 ; LCD.12@3780.27,2155.91 cw(c3800.39,2162.47) 3785.53,2177.53 ; LCD.12@3780.32,2155.76 cw(c3800.93,2162.33) 3785.53,2177.53 ; LCD.12@3780.36,2155.62 cw(c3801.42,2162.21) 3785.92,2177.92 ; LCD.12@3780.41,2155.47 cw(c3801.98,2162.08) 3785.92,2177.92 ; LCD.12@3780.38,2155.56 cw(c3798.9,2161.3) 3781.75,2170.34 ; U1.60@3952.82,3699.4 3952.82,3116.82 3659,2823 3659,2712.12 3660,2711.12 3660,2624 3797.53,2486.47 3797.53,2189.53 ; 3785.92,2177.92 cw(c3756,2207.84) 3756,2165.53 ccw(c3756,2207.84) 3785.92,2177.92 ; 3785.92,2177.92 ccw(c3815.84,2148) 3773.53,2148 cw(c3815.84,2148) 3785.92,2177.92 ; 3797.53,2189.53 ccw(c3841.11,2145.95) 3779.48,2145.95 cw(c3841.11,2145.95) 3797.53,2189.53
PE10: LCD.11 U1.63 | length 1934.4
  Top Layer w7: 3636,2816 3636,2824.52 3893.76,3082.29 3893.76,3095
  Top Layer w8: 3636,2816 3636,2608 3756,2488 LCD.11@3756,2248 ; 3893.76,3095 U1.63@3893.76,3699.4 ; 3756,2290.32 cw(c3713.68,2290.32) 3743.61,2260.39 ccw(c3713.68,2290.32) 3756,2290.32 ; 3756,2290.32 ccw(c3798.32,2290.32) 3768.39,2260.39 cw(c3798.32,2290.32) 3756,2290.32 ; 3756,2309.63 cw(c3694.37,2309.63) 3737.95,2266.05 ccw(c3694.37,2309.63) 3756,2309.63 ; 3756,2309.63 ccw(c3817.63,2309.63) 3774.05,2266.05 cw(c3817.63,2309.63) 3756,2309.63
PE11: LCD.10 U1.64 | length 2061.3
  Top Layer w7: 3616,2816 3616.05,2816.05 3616.05,2822.95 3874.08,3080.99 3874.08,3113
  Top Layer w8: 3616,2816 3616,2591 3703,2504 3703,2195 LCD.10@3656,2148 ; LCD.10@3642.84,2154.03 cw(c3677.67,2138.08) 3670.8,2175.76 ; LCD.10@3662.03,2134.84 ccw(c3646.08,2169.67) 3683.76,2162.8 ; 3874.08,3113 U1.64@3874.08,3699.4 ; 3682.78,2174.78 cw(c3660.05,2197.5) 3657.43,2165.47 ccw(c3660.05,2197.5) 3682.78,2174.78 ; 3682.78,2174.78 ccw(c3705.5,2152.05) 3673.47,2149.43 cw(c3705.5,2152.05) 3682.78,2174.78 ; 3695,2187 cw(c3661.9,2220.1) 3658.08,2173.44 ccw(c3661.9,2220.1) 3695,2187 ; 3695,2187 ccw(c3728.1,2153.9) 3681.44,2150.08 cw(c3728.1,2153.9) 3695,2187
PE12: LCD.9 U1.65 | length 1909.8
  Top Layer w8: LCD.9@3656,2248 3656,2500 3596,2560 3596,2822 3854.39,3080.39 U1.65@3854.39,3699.4 ; 3656,2290.32 cw(c3613.68,2290.32) 3643.61,2260.39 ccw(c3613.68,2290.32) 3656,2290.32 ; 3656,2290.32 ccw(c3698.32,2290.32) 3668.39,2260.39 cw(c3698.32,2290.32) 3656,2290.32 ; 3656,2309.63 cw(c3594.37,2309.63) 3637.95,2266.05 ccw(c3594.37,2309.63) 3656,2309.63 ; 3656,2309.63 ccw(c3717.63,2309.63) 3674.05,2266.05 cw(c3717.63,2309.63) 3656,2309.63
PE13: LCD.8 U1.66 | length 2639.6
  Top Layer w8: v1@3220,2926 cw(c3220,2887.37) 3247.31,2914.69 cw(c3274.63,2942) v1@3236,2942 ; v1(3220,2942) 3414.47,2747.53 3414.47,2080.53 3439,2056 3520,2056 3556,2092 ; LCD.8@3539.26,2128.73 cw(c3507.35,2092) 3556,2092 ; LCD.8@3544.5,2134.77 cw(c3522.59,2109.55) 3556,2109.55 cw(c3589.41,2109.55) LCD.8@3567.5,2134.77 ; LCD.8@3556,2148 3556,2092 ; LCD.8@3572.74,2128.73 ccw(c3604.65,2092) 3556,2092 ; v1(3816,3800) 3834.71,3781.29 U1.66@3834.71,3699.4
  Bottom Layer w8: v1@3208.69,2953.31 ccw(c3181.37,2980.63) 3220,2980.63 ccw(c3258.63,2980.63) v1@3231.31,2953.31 ; v1(3220,2942) 3220,3098 3816,3694 v1(3816,3800)
PE14: LCD.7 U1.67 | length 1953.5
  Top Layer w8: v1@3428.69,2924.69 cw(c3401.37,2897.37) 3440,2897.37 cw(c3478.63,2897.37) v1@3451.31,2924.69 ; v1(3440,2936) 3440,2872 3556,2756 LCD.7@3556,2248 ; LCD.7@3537.95,2266.05 ccw(c3494.37,2309.63) 3556,2309.63 ccw(c3617.63,2309.63) LCD.7@3574.05,2266.05 ; LCD.7@3543.61,2260.39 ccw(c3513.68,2290.32) 3556,2290.32 ccw(c3598.32,2290.32) LCD.7@3568.39,2260.39 ; U1.67@3815.02,3699.4 v1(3815.02,3555.98) v1@3825,3546
  Bottom Layer w8: v1@3428.69,2947.31 ccw(c3401.37,2974.63) 3440,2974.63 ccw(c3478.63,2974.63) v1@3451.31,2947.31 ; v1(3440,2936) 3440,3023 3543.5,3126.5 3543.5,3264.5 3815.02,3536.02 v1(3815.02,3555.98)
PE15: LCD.6 U1.68 | length 1953.5
  Top Layer w8: LCD.6@3456,2148 3507,2199 3507,2765 3396,2876 3396,2980 3417,3001 3475,3001 v1(3495,2981) ; v1(3767,3191) 3781,3191 3832,3242 3832,3460 3778,3514 3778,3593 3795.34,3610.34 U1.68@3795.34,3699.4
  Bottom Layer w8: v1(3495,2981) 3665,3151 ; 3660.5,3146.5 3665,3151 ; v1(3767,3191) 3705,3191 3665,3151
RB: SYN2.6 U1.41 | length 3003
  Top Layer w8: v1(4248,3964) 4326.83,3885.17 U1.41@4326.83,3699.4
  Bottom Layer w8: SYN2.6@1868,3572 1924,3516 2188,3516 2216,3544 2216,3596 2269,3649 3127,3649 3538,4060 4164,4060 4248,3976 v1(4248,3964)
RECR: SYN2.7 U1.42 | length 3473.4
  Top Layer w8: v2(3904,4188) 4307.15,3784.85 U1.42@4307.15,3699.4
  Bottom Layer w8: SYN2.7@1768,3572 1768,4108 1984,4324 3768,4324 v2(3904,4188)
SDIO_PD2: J1.3 R19.2 U1.116 | length 2510.8
  Top Layer w8: v1(2192,2416) 2263.42,2416 J1.3@2273.39,2406.03 ; U1.116@3854.39,2813.58 3854.39,2852.77 3904,2902.38 3904,3000 v1(3920,3016)
  Bottom Layer w8: R19.2@2122.87,2464.44 cw(c2122.87,2414.48) 2158.19,2449.81 ; R19.2@2122.87,2472.44 cw(c2122.87,2441.8) R19.2@2144.53,2463.47 ; R19.2@2122.87,2488 2122.87,2485.13 v1(2192,2416) 2206.5,2430.5 3174.5,2430.5 3760,3016 v1(3920,3016) ; R19.2@2134.49,2484.06 ccw(c2159.96,2484.06) R19.2@2141.95,2466.05 ; R19.2@2142.49,2484.06 ccw(c2187.27,2484.06) 2155.61,2452.39
TCK: JTAG.9 R6.2 U1.109 | length 1361.2
  Top Layer w8: v1(3705,2711) 3705,2725 3688,2742 3688,2784.98 U1.109@3716.6,2813.57
  Bottom Layer w8: v1(3705,2711) 3728,2711 3806,2633 3806,1928 3786,1908 3786,1800 JTAG.9@3835,1751 3835,1657.13 R6.2@3903.13,1589 ; JTAG.9@3831,1747 JTAG.9@3835,1743
TDI: JTAG.5 R2.1 U1.110 | length 2638.5
  Top Layer w8: v2(2877,2338) 2877,2135 3208,1804 3582,1804 JTAG.5@3635,1751 ; U1.110@3736.28,2813.58 3736.28,2867.28 3799,2930 v1(3827,2930)
  Bottom Layer w8: v2@2885,2340 3144.2,2340 3453.2,2649 3546,2649 v1(3827,2930) ; R2.1@3631,1591 3635,1595 JTAG.5@3635,1751
TDO: JTAG.13 R5.1 U1.133 | length 1415.5
  Top Layer w7: 4189.04,2716.96 4189.04,2675.96 4297,2568 4297,2088 4199,1990
  Top Layer w8: JTAG.13@4035,1751 4082,1798 4082,1910 4162,1990 4199,1990 ; 4189.04,2716.96 U1.133@4189.04,2813.57
  Bottom Layer w8: JTAG.13@4035,1751 4076,1710 R5.1@4076,1590
TMS: JTAG.7 R4.1 U1.105 | length 3361.9
  Top Layer w8: v2(2638,2076) 2638,2465 v2(2917,2744) ; U1.105@3618.17,2971.05 3692.05,2971.05 3708,2987 v1(3708,3052)
  Bottom Layer w8: v2(2638,2076) 2735,1979 3611,1979 3684,1906 3684,1809 3735,1758 JTAG.7@3735,1751 3735,1609 R4.1@3716,1590 ; v2(2917,2744) 2963,2698 3299.3,2698 3655.3,3054 v1@3706,3054
USART1_RX: U1.101 WIFI.4 | length 1700.5
  Top Layer w8: WIFI.4@2525.95,2865.95 ccw(c2482.37,2822.37) 2482.37,2884 ccw(c2482.37,2945.63) WIFI.4@2525.95,2902.05 ; WIFI.4@2531.61,2871.61 ccw(c2501.68,2841.68) 2501.68,2884 ccw(c2501.68,2926.32) WIFI.4@2531.61,2896.39 ; WIFI.4@2544,2884 2412,2884 2368,2928 2368,2992 2405,3029 3236.2,3029 3257,3049.8 U1.101@3618.17,3049.8 U1.101@3614.74,3046.36
USART1_TX: U1.102 WIFI.3 | length 1256.5
  Top Layer w8: WIFI.3@2544,2984 3269.89,2984 3316,3030.11 U1.102@3618.17,3030.11 ; WIFI.3@2556.39,2971.61 cw(c2586.32,2941.68) 2586.32,2984 cw(c2586.32,3026.32) WIFI.3@2556.39,2996.39 ; WIFI.3@2562.05,2965.95 cw(c2605.63,2922.37) 2605.63,2984 cw(c2605.63,3045.63) WIFI.3@2562.05,3002.05
USART2_RX: P5.1 U1.37 | length 1120
  Top Layer w10: U1.37@4405.57,3699.4 4979.4,3699.4 5176,3896 P5.1@5296,3896 ; P5.1@5278.66,3878.66 ccw(c5236.79,3836.79) 5236.79,3896 ccw(c5236.79,3955.21) P5.1@5278.66,3913.34 ; P5.1@5285.73,3885.73 ccw(c5260.93,3860.93) 5260.93,3896 ccw(c5260.93,3931.07) P5.1@5285.73,3906.27
USART2_TX: P5.2 U1.36 | length 1162.3
  Top Layer w10: U1.36@4504,3600.98 4767.98,3600.98 4836.5,3669.5 5013.5,3669.5 5152,3808 5308,3808 P5.2@5396,3896 ; P5.2@5371.47,3896 cw(c5312.26,3896) 5354.13,3854.13 cw(c5396,3812.26) P5.2@5396,3871.47 ; P5.2@5381.47,3896 cw(c5346.4,3896) 5371.2,3871.2 cw(c5396,3846.4) P5.2@5396,3881.47
USART3_RX: SYN.4 U1.69 | length 2579.2
  Top Layer w8: SYN.4@2542.47,4372 ccw(c2480.84,4372) 2524.42,4415.58 ccw(c2568,4459.16) SYN.4@2568,4397.53 ; SYN.4@2550.47,4372 ccw(c2508.16,4372) 2538.08,4401.92 ccw(c2568,4431.84) SYN.4@2568,4389.53 ; SYN.4@2568,4372 2448,4492 2448,4696 2492,4740 3188,4740 3775.65,4152.35 U1.69@3775.65,3699.4
USART3_TX: SYN.3 U1.70 | length 1910.6
  Top Layer w8: SYN.3@2568,4472 3392,4472 3755.97,4108.03 U1.70@3755.97,3699.4 ; SYN.3@2580.39,4459.61 cw(c2610.32,4429.68) 2610.32,4472 cw(c2610.32,4514.32) SYN.3@2580.39,4484.39 ; SYN.3@2586.05,4453.95 cw(c2629.63,4410.37) 2629.63,4472 cw(c2629.63,4533.63) SYN.3@2586.05,4490.05
pads on no net: AMS117.4 BLE102.2 BLE102.3 BLE102.5 BLE102.6 BLE102.7 BLE102.8 BLE102.9 BLE102.10 BLE102.15 BLE102.16 BLE102.18 BLE102.21 BLE102.22 BLE102.24 BLE102.25 BLE102.26 BLE102.27 BLE102.30 BLE102.31 BLE102.32 BLE102.33 BLE102.34 BLE102.35 BLE102.36 BLE102.37 BLE102.38 BLE102.39 BLE102.40 BLE102.41 BLE102.42 BLE102.43 J1.9 JTAG.11 JTAG.17 JTAG.19 SWITCH-开关.3 SWITCH-开关.4 SYN1.1 SYN1.2 SYN1.3 SYN1.4 SYN1.5 SYN1.6 SYN1.7 SYN1.8 SYN2.5 SYN2.8 SYN.1 SYN.2 SYN.5 SYN.6 U1.5 U1.7 U1.10 U1.11 U1.12 U1.13 U1.14 U1.15 U1.18 U1.19 U1.20 U1.21 U1.22 U1.26 U1.27 U1.28 U1.29 U1.34 U1.35 U1.40 U1.43 U1.44 U1.45 U1.46 U1.49 U1.50 U1.53 U1.54 U1.55 U1.56 U1.57 U1.73 U1.74 U1.75 U1.76 U1.87 U1.88 U1.89 U1.90 U1.91 U1.92 U1.93 U1.96 U1.97 U1.100 U1.103 U1.104 U1.106 U1.117 U1.122 U1.124 U1.125 U1.126 U1.127 U1.128 U1.129 U1.132 U1.135 U1.136 U1.137 U1.139 U1.140 USB.2 USB.3 USB.4 USB.6 USB.7 USB.8 USB.9 WIFI.5 WIFI.6
copper on no net: | length 0.5
  Top Layer w8: 4307.15,2813.57 4307.53,2813.19
  other v3: 5414,1173 1717,1205 2061,4600 3611,4680 2628,4852 5344,4856

## Polygon pours and split planes (outlines as drawn)
GND on Top Layer "Top Overlay-No Net" (solid, remove dead copper, pour order 4): 1644,4944 1656,4932 3304,4932 4152,4932 4244,4840 4272,4812 4272,4088 5428,4088 5480,4036 5452,4008 5452,1044 5452,1032 5420,1000 5412,1008 1604,1008 1604,4892 1648,4936
GND on Bottom Layer "Top Overlay-No Net" (solid, pour order 3): 1656.96,4957 1668.96,4945 3316.96,4945 4164.96,4945 4256.96,4853 4284.96,4825 4284.96,4101 5440.96,4101 5492.96,4049 5464.96,4021 5464.96,1057 5464.96,1045 5432.96,1013 5424.96,1021 1616.96,1021 1616.96,4905 1660.96,4949

## Keep-outs
Keep-Out Layer:
  lines w19.68: 1604,1000 1600,1004 1600,4970 5482,4970 5488,4976 5508,4956 5508,1012 5520,1000 ; 1604,1028 5520,1028

## Silkscreen, mask and mechanical layers (free items; w line width, h text height)
Top Overlay:
  text "S-" at 2716,4236 h40
  text "BTX" at 5264,4088 h40
  text "BRX" at 5368,4088 h40
  text "S+" at 2720,3960 h40
  text "MRX" at 5264,3800 h40
  text "MTX" at 5368,3800 h40
  text "口" at 3825,1652 h50

## Text inside footprints (layer, text, board x,y; h text height)
AMS117: Top Overlay "ASM1117" at 4543,1136 h50 r90
BLE102: Mechanical 6 "Polygon Pour cutout" at 4401,5252 h50
C8: Top Overlay "+" at 4985.76,1241.8 h50 r270